# Altium PCB AC_BASE-V2.0.PcbDoc
Units mil, origin at the board's own origin, x right, y up, seen from the top; angles counter-clockwise.
Board outline 3543.31 x 1665.35 mil, 2 copper layers (Top Layer, Bottom Layer), stack 38.627 mil thick; 27 components, 28 nets, 116 pads, 18 vias.
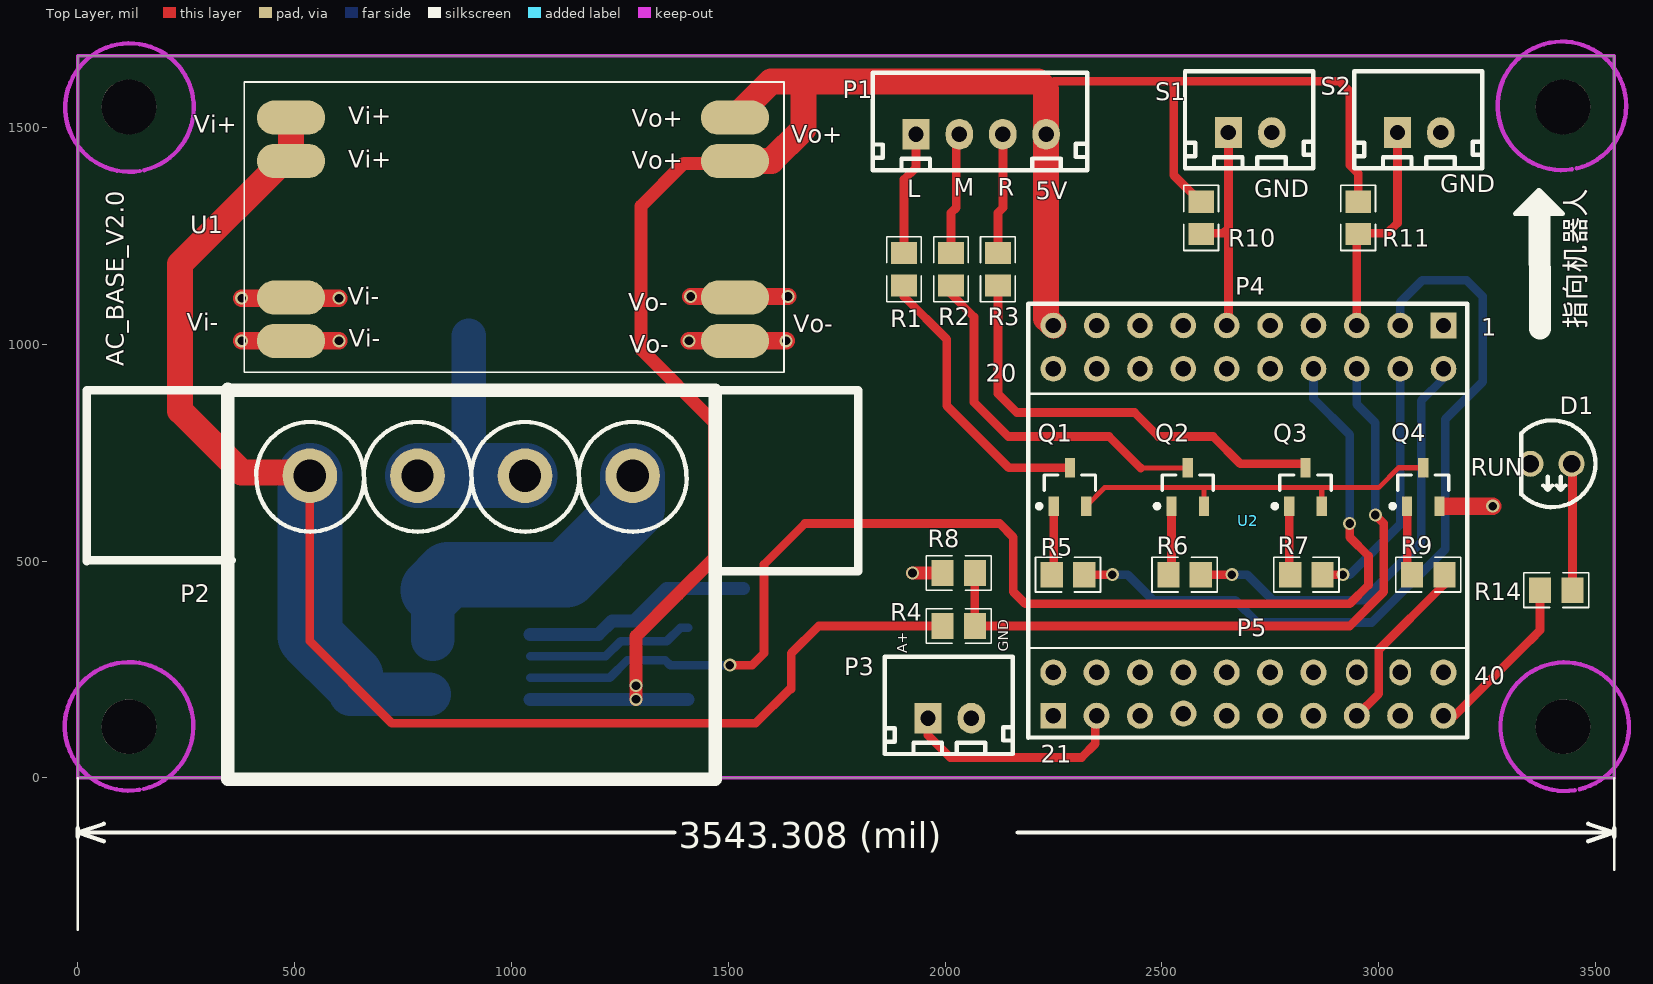
[diagram p0: Top Layer view]
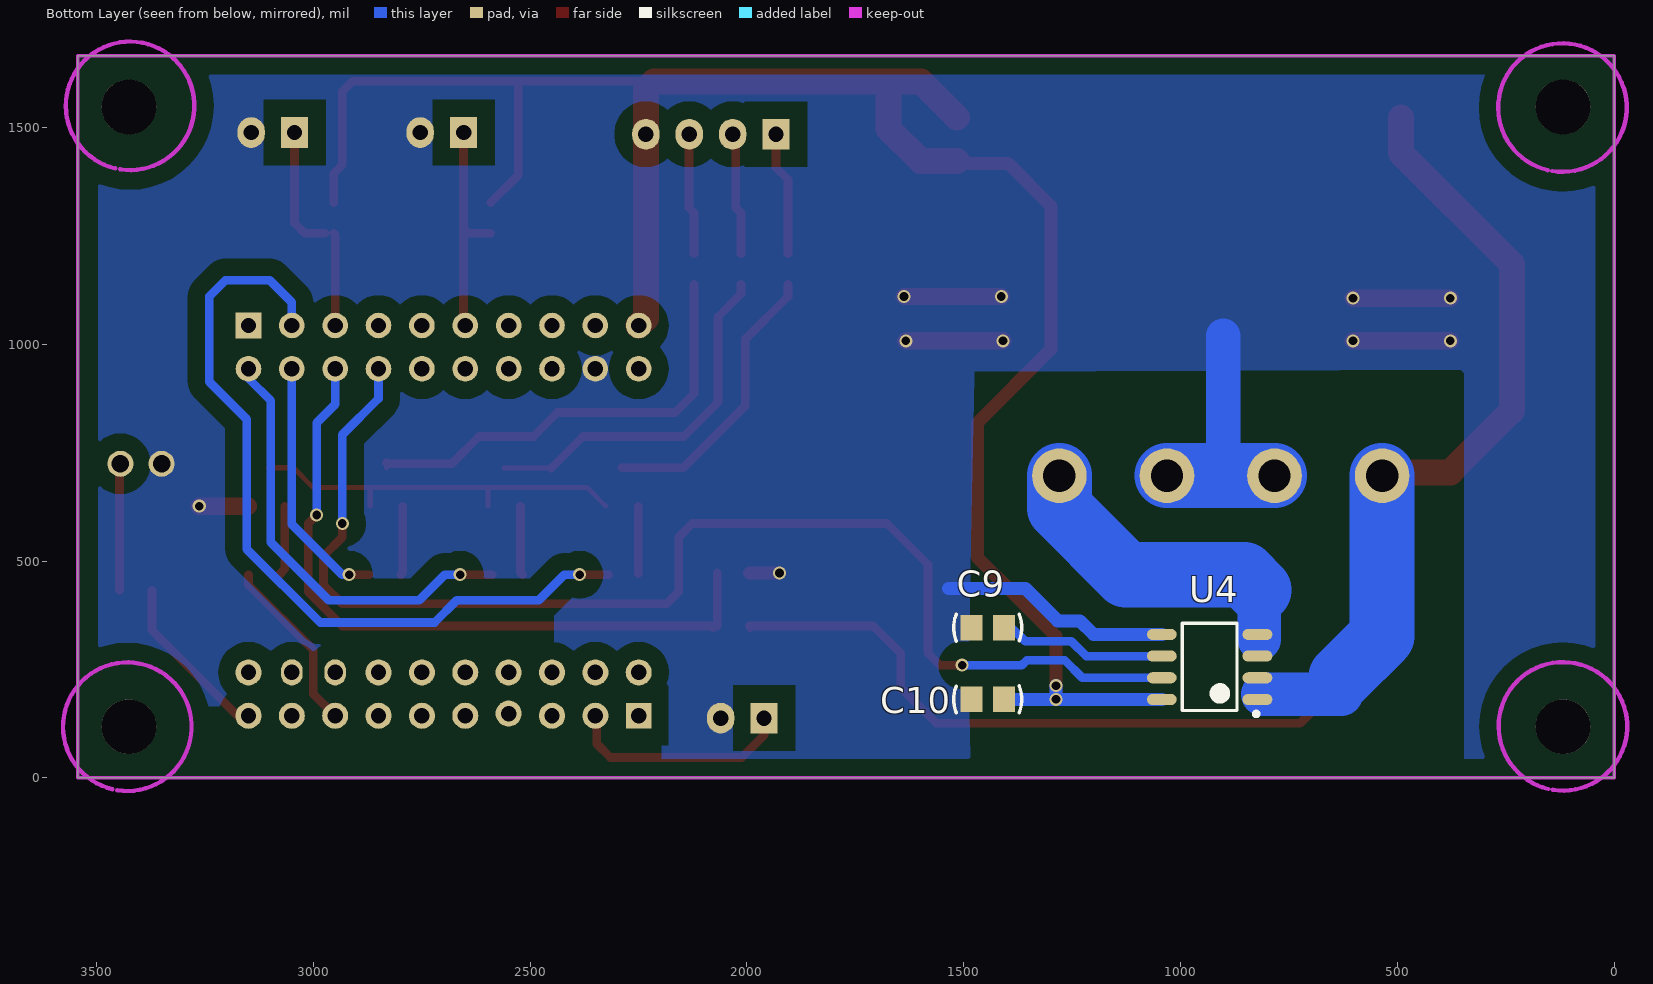
[diagram p1: Bottom Layer view, seen from below]

## Layer stack, top to bottom
Top Layer: signal copper 1.4
Dielectric: dielectric 35.8268, FR-4, Dk 4.8
Bottom Layer: signal copper 1.4

## Board outline
0,0 3543.31,0 3543.31,1665.35 0,1665.35

## Design rules (kind name [scope] priority, off if disabled: settings)
Clearance InPolygon [InPolygon] p1: gap=40
Clearance [All] p2: gap=10
HoleSize [All] p1: absolutevalues=TRUE maxlimit=393.7 minlimit=11.81 maxpercent=80.000 minpercent=20.000
HoleToHoleClearance [All] p1: gap=3.94 allowstackedmicrovias=TRUE
MinimumSolderMaskSliver [All] p1: minsoldermaskwidth=3.94
PlaneClearance [All] p1: clearance=40
PolygonConnect PolygonConnect_NetP6_1 [InNet('NetP6_1')] p1: connectstyle=Direct reliefconductorwidth=10 reliefentries=4 polygonreliefangle="90 Angle"
PolygonConnect PolygonConnect_VCC_IN [InNet('VCC_IN')] p2: connectstyle=Direct reliefconductorwidth=10 reliefentries=4 polygonreliefangle="90 Angle"
PolygonConnect PolygonConnect_VIA_GND [InNet('GND')] p3: connectstyle=Direct reliefconductorwidth=10 reliefentries=4 polygonreliefangle="90 Angle"
PolygonConnect [All] p4: connectstyle=Relief reliefconductorwidth=10 reliefentries=4 polygonreliefangle="90 Angle"
RoutingVias [All] p1: holewidth=11.81 width=19.68 viastyle="Through Hole" minholewidth=7.87 minwidth=19.68 maxholewidth=28 maxwidth=118.11
SilkToSilkClearance [All] p1: silktosilkclearance=3.94
SilkscreenOverComponentPads SilkToSolderMaskClearance [IsPad] p1: minsilkscreentomaskgap=3.94
SolderMaskExpansion [All] p1: expansion=4
Width [All] p1: maxlimit=200 minlimit=11.81 preferedwidth=11.81
22 further rules are at their usual default settings.

## Components (designator, comment, footprint, x,y, rotation, side; value= is the part's Value field where it differs from the comment)
C9 "Cap" C0805 1444.88,346.46 r180 bottom
C10 "Cap" C0805 1444.88,181.1 r180 bottom
D1 "LED" LED-H-R2.54 3444.88,724.41 r180 top
P1 "R_led" XH2.54-4P 1933.07,1484.25 r0 top
P2 "POWERIN" PORT-SIP4-6.3-WA-LOCK 535.43,696.85 r0 top
P3 "继电器控制信号" XH2.54-2P 1960.63,137.8 r0 top
Q1 "BC817" SOT-23_N 2248.03,625.98 r90 top
Q2 "BC817" SOT-23_N 2519.68,625.98 r90 top
Q3 "BC817" SOT-23_N 2791.34,625.98 r90 top
Q4 "BC817" SOT-23_N 3062.99,625.98 r90 top
R1 "Res1" R0805 1905.51,1173.23 r90 top
R2 "Res1" R0805 2013.78,1173.23 r90 top
R3 "Res1" R0805 2122.05,1173.23 r90 top
R4 "Res1" R0805 2031.5,350.39 r0 top
R5 "Res1" R0805 2283.46,468.5 r180 top
R6 "Res1" R0805 2552.49,468.5 r180 top
R7 "Res1" R0805 2833.33,468.5 r180 top
R8 "Res1" R0805 2031.5,472.44 r180 top
R9 "Res1" R0805 3114.17,468.5 r180 top
R10 "Res1" R0805 2590.55,1291.34 r90 top
R11 "Res1" R0805 2952.76,1291.34 r90 top
R14 "Res1" R0805 3409.45,433.07 r180 top
S1 "ON" XH2.54-2P 2653.54,1488.19 r0 top
S2 "ON" XH2.54-2P 3043.31,1488.19 r0 top
U1 "DCDC-50/5" DCDC50/5 948.82,1240.16 r0 top
U2 "STM32F103C8T6_MODE" STM32F103C8T6_MODE 3149.61,1043.31 r270 top
U4 "ACS712ELCTR-30A" ACS712-SOIC8 933.07,255.91 r0 bottom

## Footprints (in the part's own frame and the unit in brackets; to place one, negate y for a bottom-side part, rotate by r counter-clockwise, add the part's x,y. Pads: shape width x height; smd on the part's side, far side on the other; paste and mask are expansions set on the pad)
ACS712-SOIC8 [mm] "SOP, 8-Leads, Body 4.90x3.90mm, Pitch 1.27mm, IPC Medium Density"
  oval 1.75x0.65 smd: 1(-2.8,1.905) 2(-2.8,0.635) 3(-2.8,-0.635) 4(-2.8,-1.905) 5(2.8,-1.905) 6(2.8,-0.635) 7(2.8,0.635) 8(2.8,1.905)
  silkscreen extent -2.85,-2.55 1.6,2.88
C0805 [mm] "贴片电容0805"
  rect 1.3x1.5 smd: 1(-0.95,0) 2(0.95,0)
  silkscreen extent -2,-0.79 2,0.79, body extent -1.27,-0.64 1.27,0.64, height 0.9
DCDC50/5 [mm]
  oval 4x2 smd: 1(-11.603,7.175) 2(-11.603,4.635) 3(-11.603,-3.365) 4(-11.603,-5.905) 5(14.397,-5.905) 6(14.397,-3.365) 7(14.397,4.635) 8(14.397,7.175)
  silkscreen extent -14.35,-7.74 17.27,9.26
LED-H-R2.54 [mil]
  round 60 hole 40: 1(0,0) 2(95,0)
  silkscreen extent -55,-100 116,100
PORT-SIP4-6.3-WA-LOCK [mm]
  round 3.2 hole 1.9: 1(0,0) 2(6.3,0) 3(12.6,0) 4(18.9,0)
  silkscreen extent -13.08,-17.78 32.13,5.07
R0805 [mm] "贴片带丝印"
  rect 1.3x1.5 smd: 1(-0.95,0) 2(0.95,0)
  silkscreen extent -1.91,-1.02 1.91,1.02, body extent -1.14,-0.51 1.14,0.51, height 1
SOT-23_N [mm]
  rect 1.15x0.6 smd: 1(0.018,-0.066) 2(0.018,-1.966) 3(2.268,-1.016)
  silkscreen extent -0.11,-2.52 1.84,0.91, body extent 0.44,-2.52 1.84,0.48, height 1.1
STM32F103C8T6_MODE [mm]
  rect 1.5x1.5 hole 0.9: 1(0,0) 21(22.86,-22.86)
  round 1.5 hole 0.9: 2(2.54,0) 3(0,-2.54) 4(2.54,-2.54) 5(0,-5.08) 6(2.54,-5.08) 7(0,-7.62) 8(2.54,-7.62) 9(0,-10.16) 10(2.54,-10.16) 11(0,-12.7) 12(2.54,-12.7) 13(0,-15.24) 14(2.54,-15.24) 15(0,-17.78) 16(2.54,-17.78) 17(0,-20.32) 18(2.54,-20.32) 19(0,-22.86) 20(2.54,-22.86)
  round 1.524 hole 0.899: 22(20.32,-22.86) 23(22.86,-20.32) 24(20.32,-20.32) 25(22.86,-17.78) 26(20.32,-17.78) 27(22.733,-15.24) 28(20.32,-15.24) 29(22.86,-12.7) 30(20.32,-12.7) 31(22.86,-10.16) 32(20.32,-10.16) 33(22.86,-7.62) 34(20.32,-7.62) 35(22.86,-5.08) 37(22.86,-2.54) 39(22.86,0) 40(20.32,0)
  oval 1.524x1.27 hole 0.899: 36(20.32,-5.08) 38(20.32,-2.54)
  silkscreen extent -1.27,-24.33 24.16,1.4
XH2.54-2P [mm]
  rect 1.6x1.8 hole 0.9: 1(0,0)
  oval 1.6x1.8 hole 0.9: 2(2.54,0)
  silkscreen extent -2.54,-2.1 4.96,3.6
XH2.54-4P [mm]
  rect 1.6x1.8 hole 0.9: 1(0,0)
  oval 1.6x1.8 hole 0.9: 2(2.54,0) 3(5.08,0) 4(7.62,0)
  silkscreen extent -2.54,-2.1 10.04,3.6

## Part data
C9 C10: "Capacitor"
P1: library part "Header 4", "Header, 4-Pin"
P2: library part CONN_4PIN
P3: library part "Header 2", "Header, 2-Pin"
Q1 Q2 Q3 Q4: library part mNPN, "NPN 45V 功耗 310mW"
R1 R2 R3 R4 R5 R6 R7 R8 R9 R10 R11 R14: "Resistor"
S1 S2: library part Conn_1*2
U4: library part ACS712

## Free pads (board coordinates)
  round 125.98 hole 125.98 unplated: 0(118.11,118.11) 0(118.11,1547.24) 0(3425.2,118.11) 0(3425.2,1547.24)

## Via types
v1: diameter 30, hole 20, Top Layer to Bottom Layer, 18 vias

## Nets (pads, with @x,y where several pads share a name; then routed paths per layer and width w, separated by ;. In a path a pad name is that pad's centre, name@x,y a point inside that pad or via, vN(x,y) a via of type N, cw(c..) or ccw(c..) an arc to the next point about the centre after c; other vN are vias at no path point)
CURRENT_SENSOR: U2.8 U4.7 | length 2941.3
  Top Layer w20: v1(1503.94,259.84) 1555.12,259.84 1582.68,287.4 1582.68,338.58 ; 1582.68,326.77 1582.68,492.13 1677.17,586.61 2125.98,586.61 2157.48,555.12 2157.48,429.13 2185.04,401.57 2933.07,401.57 2976.38,444.88 2976.38,511.81 2933.07,555.12 v1(2933.07,586.61)
  Bottom Layer w20: U4.7 1226.97,230.91 1267.72,271.65 1354.33,271.65 1366.14,259.84 v1(1503.94,259.84) ; U2.8 2849.61,874.8 2933.07,791.34 v1(2933.07,586.61)
GND: C9.1 C10.1 D1.2 P2.2 P2.3 P3.2 Q4.2 R8.2 S1.2 S2.2 U1.3 U1.4 U1.5 U1.6 U2.18 U4.5 | length 2192.8
  Top Layer w30: v1(1925.2,472.44) R8.2 R8.2@1988.19,472.44
  Top Layer w40: v1(377.95,1007.87) v1(602.36,1007.87) ; v1(377.95,1106.3) v1(602.36,1106.3) ; v1(1409.45,1007.87) v1(1633.86,1007.87) ; v1(1413.39,1110.24) v1(1637.8,1110.24) ; Q4.2@3149.61,626.69 v1(3263.07,626.69)
  Bottom Layer w30: U4.5 1200.98,330.91 1232.28,362.2 1283.46,362.2 1358.27,437.01 1535.43,437.01
  Bottom Layer w80: 901.57,696.85 901.57,1019.68
  Bottom Layer w150: P2.2 901.57,696.85 P2.3
IR_L: R5.1 U2.3 | length 1849.6
  Top Layer w20: R5.1@2318.9,468.5 v1(2385.83,468.5)
  Bottom Layer w20: v1(2385.83,468.5) 2421.26,468.5 2480.31,409.45 2669.29,409.45 2720.47,358.27 2984.25,358.27 3153.54,527.56 3153.54,826.77 3240.16,913.39 3240.16,1110.24 3202.76,1147.63 3100.39,1147.63 3049.61,1096.85 U2.3
IR_M: R6.1 U2.2 | length 1011.6
  Top Layer w20: R6.1@2587.93,468.5 v1(2661.42,468.5)
  Bottom Layer w20: v1(2661.42,468.5) 2696.85,468.5 2755.91,409.45 2964.57,409.45 3098.43,543.31 3098.43,870.08 3149.61,921.26 U2.2
IR_R: R7.1 U2.4 | length 585.4
  Top Layer w20: R7.1 v1(2917.32,468.5)
  Bottom Layer w20: v1(2917.32,468.5) 2933.07,468.5 3049.61,585.04 U2.4
IR_SEND: R9.1 U2.35 | length 408
  Top Layer w20: U2.35 3000,193.7 3000,295.28 3149.61,444.88 R9.1@3149.61,468.5
KEY1: R10.1 S1.1 U2.11 | length 632.6
  Top Layer w11.81: 2653.54,1421.17 S1.1
  Top Layer w20: R10.1@2590.55,1255.9 2641.73,1255.9 2653.54,1267.72 ; U2.11 2653.54,1047.24 2653.54,1244.09 ; 2653.54,1192.91 2653.54,1244.09 ; S1.1 2653.54,1267.72 ; 2653.54,1244.09 2653.54,1267.72
KEY2: R11.1 S2.1 U2.5 | length 531.6
  Top Layer w20: U2.5 2949.61,1185.04 ; 2949.61,1213.39 2949.61,1185.04 ; R11.1@2952.76,1255.9 2949.61,1252.76 2949.61,1185.04 ; R11.1@2972.44,1255.9 3019.68,1255.9 3043.31,1279.53 3043.31,1409.45 S2.1
NetC9_2: C9.2 U4.6 | length 391.3
  Bottom Layer w20: U4.6 1217.91,280.91 1251.97,314.96 1358.27,314.96 1389.76,346.46 C9.2
NetD1_1: D1.1 R14.1 | length 292.2
  Top Layer w20: D1.1 3446.85,722.44 R14.1
NetP1_1: P1.1 R1.2 | length 287
  Top Layer w20: R1.2@1905.51,1208.66 1905.51,1379.74 1933.07,1407.3 P1.1
NetP1_2: P1.2 R2.2 | length 283.6
  Top Layer w20: R2.2@2013.78,1208.66 2013.78,1303.15 2025.59,1314.96 2025.59,1476.77 P1.2
NetP1_3: P1.3 R3.2 | length 280.8
  Top Layer w20: R3.2@2122.05,1208.66 2122.05,1303.15 2133.86,1314.96 2133.86,1483.47 P1.3
NetQ1_1: Q1.1 R5.2 | length 159.3
  Top Layer w11.81: R5.2@2248.03,468.5 R5.2@2250.63,471.1
  Top Layer w20: R5.2@2250.63,471.1 Q1.1
NetQ1_2: Q1.2 Q2.2 Q3.2 Q4.3 | length 897.9
  Top Layer w11.81: Q1.2 2368.03,669.29 2554.49,669.29 2610.24,669.29 2866.14,669.29 ; Q2.2 2597.09,666.69 ; Q3.2 2868.74,666.69 2866.14,669.29 ; Q4.3 3045.98,715.28 3000,669.29 2866.14,669.29
NetQ1_3: Q1.3 R1.1 | length 663.6
  Top Layer w20: R1.1@1905.51,1137.8 1905.51,1110.24 2003.94,1011.81 2003.94,858.27 2146.93,715.28 Q1.3
NetQ2_1: Q2.1 R6.2 | length 160.4
  Top Layer w20: R6.2@2517.06,468.5 2522.28,473.73 Q2.1
NetQ2_3: Q2.3 R2.1 | length 849.9
  Top Layer w11.81: 2451,714.55 2559.68,714.55 Q2.3
  Top Layer w20: R2.1@2013.78,1137.8 R2.1 2013.78,1116.14 2066.93,1062.99 2066.93,866.14 2145.67,787.4 2378.15,787.4 2451,714.55
NetQ3_1: Q3.1 R7.2 | length 159.8
  Top Layer w20: Q3.1 2793.94,472.47 R7.2@2797.9,468.5
NetQ3_3: Q3.3 R3.1 | length 1040.3
  Top Layer w11.81: Q3.3 Q3.3@2831.34,726.55
  Top Layer w20: R3.1@2122.05,1137.8 2122.05,885.83 2165.35,842.52 2437.01,842.52 2492.12,787.4 2618.11,787.4 2681.1,724.41 2829.2,724.41 Q3.3@2831.34,726.55
NetQ4_1: Q4.1 R9.2 | length 163.6
  Top Layer w20: Q4.1 3065.59,481.65 R9.2@3078.74,468.5
RELAY: P3.1 U2.23 | length 522.4
  Top Layer w20: P3.1 1960.63,98.42 2011.81,47.24 2314.96,47.24 2346.46,78.74 U2.23@2346.46,141.73
RELAY_POWER: P2.4 U4.3 U4.4 | length 727.7
  Bottom Layer w100: U4.4@818.9,319.09 818.9,433.07
  Bottom Layer w150: 818.9,433.07 854.33,468.5 1125.98,468.5 1279.53,622.05 P2.4
RUN: R14.2 U2.39 | length 396.7
  Top Layer w20: U2.39 3174.8,143.31 3342.52,311.02 3350.39,318.9 3372.05,340.55 R14.2
TOUCHER_VOLTAGE_SENSOR: R4.2 R8.1 U2.6 | length 1629.3
  Top Layer w20: R4.2 R8.1 ; R4.2@2078.74,346.46 2082.68,350.39 2933.07,350.39 3011.81,429.13 3011.81,586.61 v1(2992.13,606.3)
  Bottom Layer w20: U2.6 2949.61,861.42 2992.13,818.9 v1(2992.13,606.3)
VCC_3V3: U2.20
VCC_5V: C10.2 P1.4 R10.2 R11.2 U1.7 U1.8 U2.19 U4.8 | length 4832.6
  Top Layer w20: U1.7@1507.13,1414.13 U1.7 ; 2233.07,1587.4 2251.97,1606.3 2527.56,1606.3 ; R10.2@2590.55,1326.77 2527.56,1389.76 2527.56,1606.3 ; R11.2@2952.76,1326.77 2952.76,1393.7 2933.07,1413.38 2933.07,1582.68 2909.45,1606.3 2527.56,1606.3
  Top Layer w30: v1(1287.4,181.1) v1(1287.4,212.6) 1287.4,326.77 1383.86,423.23 1468.5,507.87 1468.5,818.9 1299.21,988.19 1299.21,1318.9 1397.64,1417.32 U1.7@1503.94,1417.32
  Top Layer w60: U1.7 1599.8,1422.64 1673.23,1496.06 1673.23,1606.3 ; U1.8 1599.29,1606.3 1673.23,1606.3 ; U2.19 2233.07,1059.84 P1.4 2233.07,1587.4 2214.17,1606.3 1673.23,1606.3
  Bottom Layer w30: U4.8 1287.4,180.91 1407.28,180.91 C10.2 ; v1(1287.4,181.1) v1(1287.4,212.6)
VCC_IN+: P2.1 R4.1 U1.1 U1.2 U4.1 U4.2 | length 4004.6
  Top Layer w20: P2.1 535.43,314.96 724.41,125.98 1562.99,125.98 1641.73,204.72 ; 1645.67,204.72 1645.67,287.4 1708.66,350.39 R4.1@1988.19,350.39 ; 1881.89,350.39 R4.1@1988.19,350.39 ; R4.1@1992.13,346.46 R4.1@1988.19,350.39 ; R4.1 R4.1@1988.19,350.39
  Top Layer w60: U1.1 492.01,1441.06 236.22,1185.28 236.22,846.46 377.95,704.72 P2.1@547.24,704.72
  Bottom Layer w100: 629.92,192.91 U4.1@810.83,192.91
  Bottom Layer w150: P2.1 535.43,326.77 629.92,232.28
pads on no net: U2.1 U2.7 U2.9 U2.10 U2.12 U2.13 U2.14 U2.15 U2.16 U2.17 U2.21 U2.22 U2.24 U2.25 U2.26 U2.27 U2.28 U2.29 U2.30 U2.31 U2.32 U2.33 U2.34 U2.36 U2.37 U2.38 U2.40

## Polygon pours and split planes (outlines as drawn)
GND on Bottom Layer "GND" (solid, remove dead copper, pour order 2): 66.93,1645.67 452.76,1645.67 3496.06,1645.67 3496.06,39.37 3350.39,39.37 39.37,39.37 39.37,1618.11 61.64,1640.38

## Keep-outs
Keep-Out Layer:
  lines w7.87: 0,0 0,1665.36 3543.31,1665.36 3543.31,0 0,0
  lines w10: 141.73,-27.56 cw(c118.4,118.82) 152.49,-25.43 ; 142.78,1399.45 cw(c119.45,1545.83) 153.54,1401.57 ; 3445.93,1403.39 cw(c3422.6,1549.77) 3456.69,1405.51 ; 3452.33,-28.28 cw(c3428.99,118.11) 3463.09,-26.15

## Other copper
Bottom Layer:
  pour cut-out: 346.46,933.07 346.46,23.62 1484.25,3.94 1488.19,204.72 1484.25,547.24 1476.38,925.2 1476.38,937.01 354.33,940.94
  pour cut-out: 2444.88,385.83 2507.87,385.83 2511.81,381.89 2511.81,283.46 2444.88,283.46
  pour cut-out: 3208.66,106.3 3240.16,106.3 3248.03,114.17 3248.03,165.35 3208.66,165.35
  pour cut-out: 2196.85,82.68 2196.85,19.69 2259.84,19.69 2263.78,23.62 2263.78,82.68

## Silkscreen, mask and mechanical layers (free items; w line width, h text height)
Top Overlay:
  lines w5: 0,-350.39 0,0 ; 2191.61,299.21 3204.61,299.21 ; 2191.61,885.83 3204.61,885.83 ; 3543.31,-212.6 3543.31,-86.62 ; 3543.31,0 3543.31,-86.62 ; 3543.31,-86.61 3543.31,-86.62
  lines w10: 0,-135.98 0,-115.98 ; 60,-145.98 0,-125.98 ; 60,-105.98 0,-125.98 ; 1375.78,-125.98 0,-125.98 ; 2167.53,-125.98 3543.31,-125.98 ; 3325.63,1310.02 3415.53,1310.02 ; 3335.45,1319.84 3390.34,1319.84 3399.53,1310.65 ; 3337.3,1321.85 3392.2,1321.85 ; 3345.17,1317.92 3400.07,1317.92 ; 3368.53,1355.02 3314.53,1301.02 3424.53,1301.02 3370.53,1355.02 ; 3483.31,-145.98 3543.31,-125.98 ; 3483.31,-105.98 3543.31,-125.98 ; 3543.31,-135.98 3543.31,-115.98
  lines w50: 3370.88,1326.06 3371.98,1035.46
  text "Vi+" at 267.72,1488.19 h40
  text "Vo+" at 1645.67,1464.57 h40
  text "GND" at 3141.73,1350.39 h40
  text "M" at 2019.68,1342.52 h40
  text "R" at 2122.05,1342.52 h40
  text "L" at 1913.39,1338.58 h40
  text "GND" at 2712.6,1338.58 h40
  text "5V" at 2208.66,1334.65 h40
  text "P4" at 2669.29,1114.17 h40
  text "指向机器人" at 3492.13,1035.43 h80 r90
  text "Vi-" at 251.97,1031.5 h40
  text "Vo-" at 1649.61,1027.56 h40
  text "1" at 3236.22,1019.69 h40
  text "AC_BASE_V2.0" at 106.3,948.82 h40 r90
  text "20" at 2094.49,913.39 h40
  text "RUN" at 3212.6,696.85 h40
  text "P5" at 2673.23,326.77 h40
  text "GND" at 2153.54,291.34 h40 r90
  text "A+" at 1921.26,287.4 h40 r90
  text "40" at 3220.47,216.54 h40
  text "21" at 2220.47,35.43 h40
  text "3543.308 (mil)" at 1385.78,-161.98 h60
Bottom Solder:
  lines w100: 633.86,232.28 633.86,192.91 811.02,192.91 ; 818.9,318.9 818.9,397.64
  lines w150: 535.43,704.72 535.43,326.77 625.98,236.22 ; 779.53,696.85 1031.5,696.85 ; 818.9,433.07 854.33,468.5 1125.98,468.5 1283.46,625.98 1283.46,704.72

## Dimensions
0,0 to 0,1665.36 on Top Overlay

## Text inside footprints (layer, text, board x,y; h text height)
U1: Top Overlay "Vo-" at 1269.15,1077.82 h40; Top Overlay "Vo-" at 1271.68,980.29 h40; Top Overlay "Vo+" at 1278.15,1404.64 h40; Top Overlay "Vo+" at 1278.15,1501.82 h40; Top Overlay "Vi-" at 624.68,994.45 h40; Top Overlay "Vi-" at 622.15,1090.82 h40; Top Overlay "Vi+" at 623.5,1407.44 h40; Top Overlay "Vi+" at 623.5,1507.83 h40